# Altium PCB Therm_Expand_PCB.PcbDoc
Units mil, origin at the board's own origin, x right, y up, seen from the top; angles counter-clockwise.
Board outline 2695 x 1977.5 mil, 2 copper layers (Top Layer, Bottom Layer); 36 components, 65 nets, 204 pads, 124 vias.
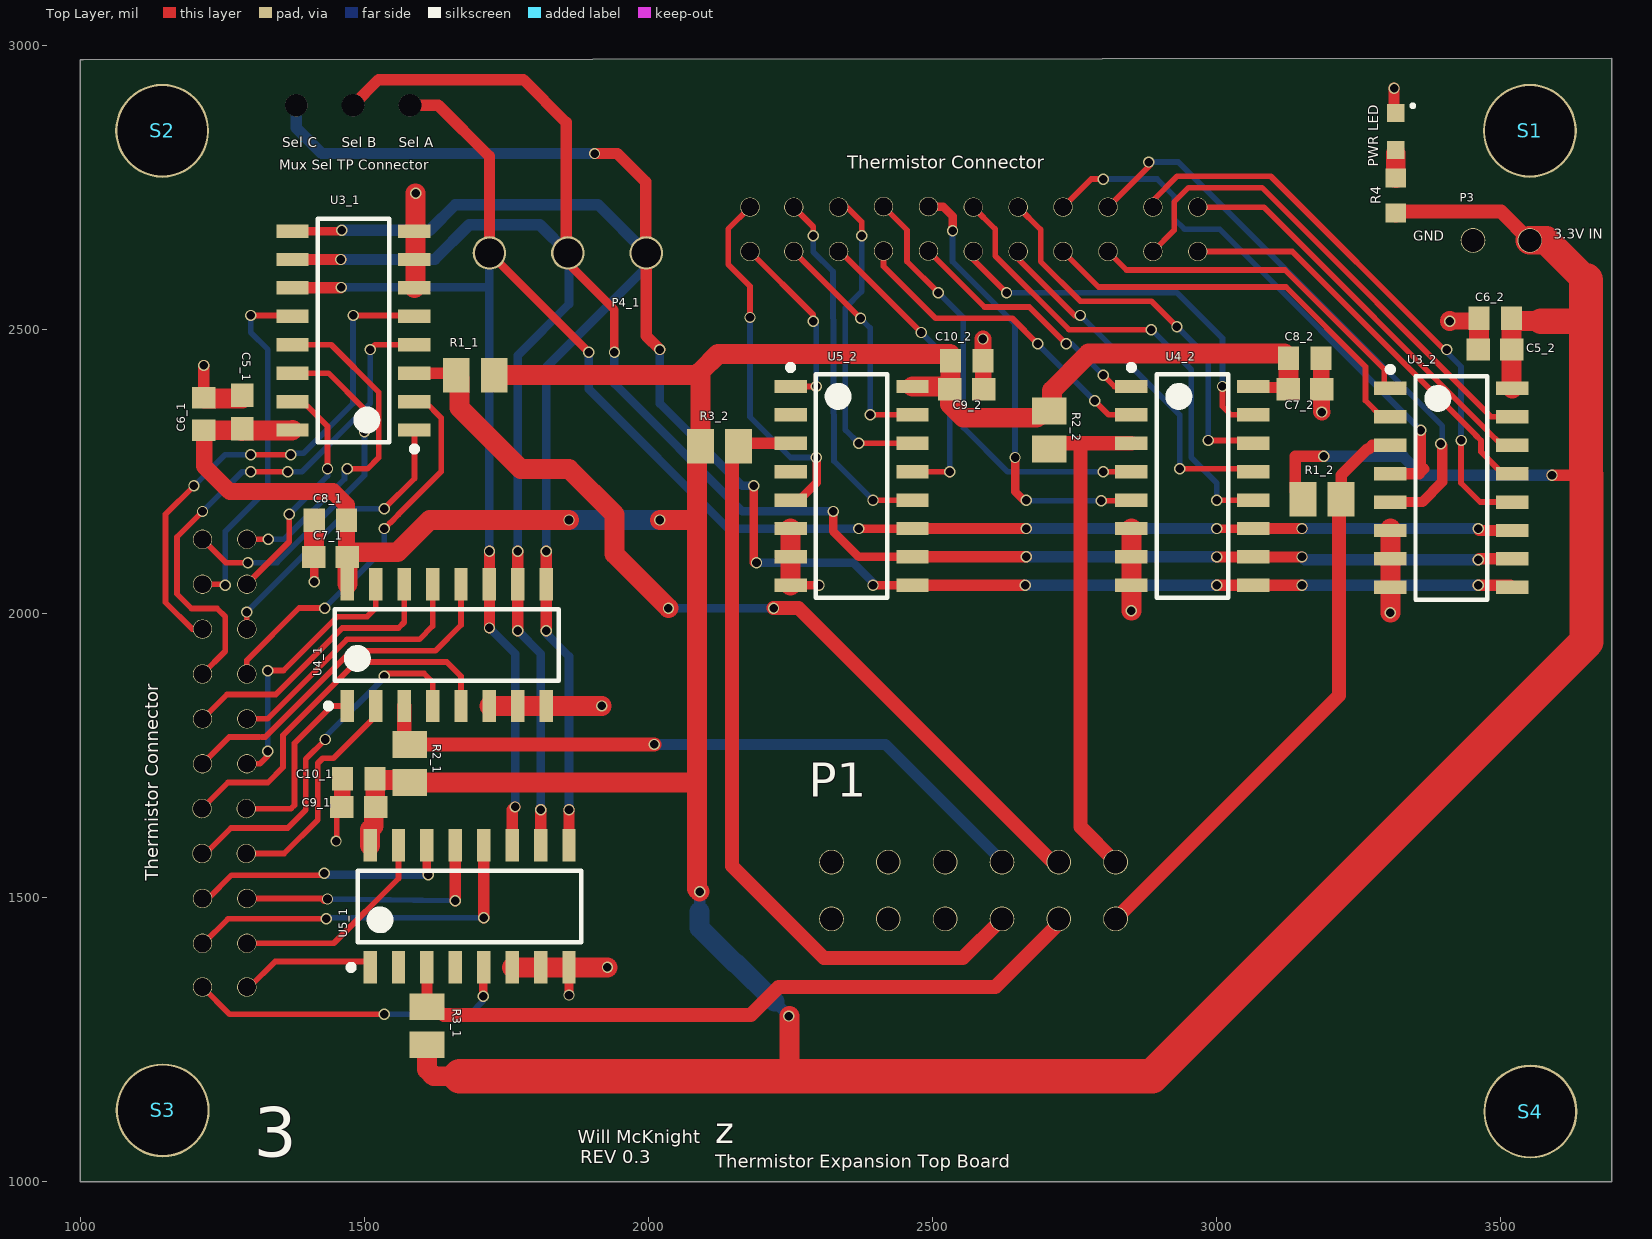
[diagram p0: Top Layer view]
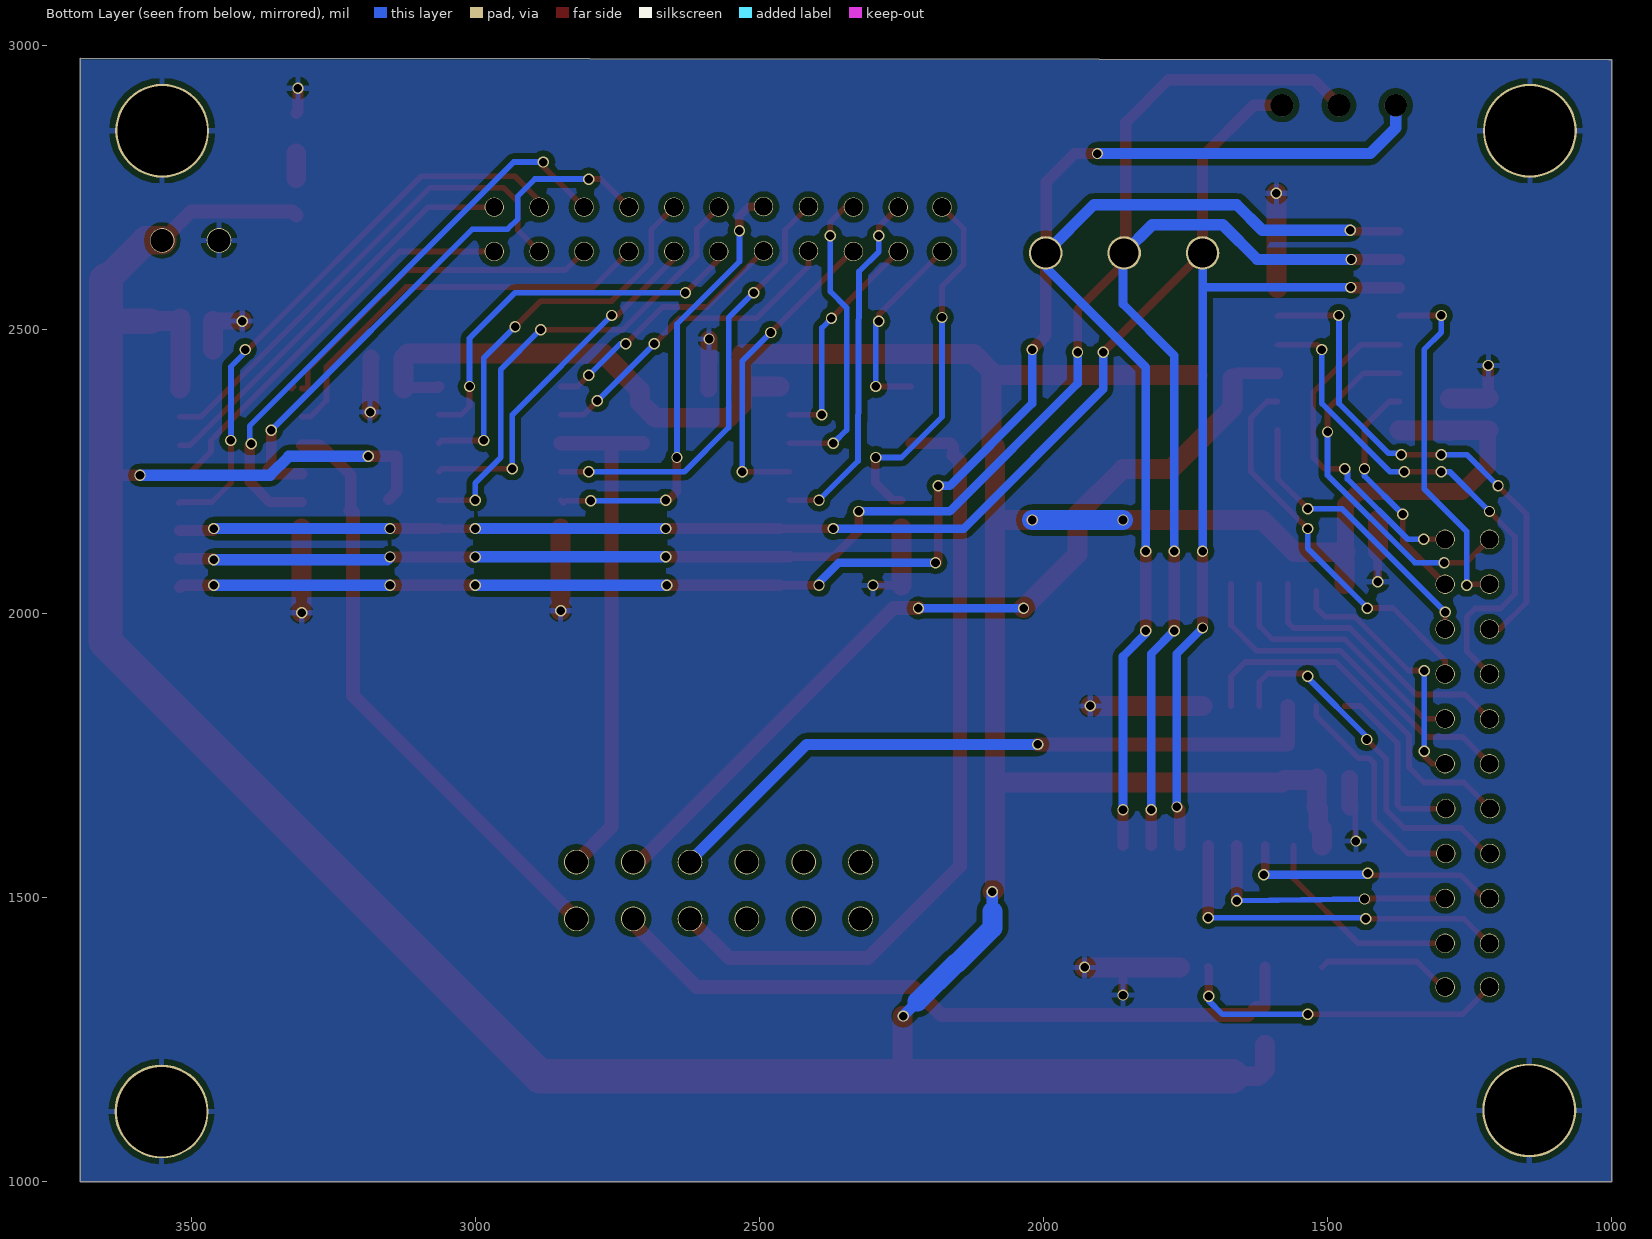
[diagram p1: Bottom Layer view, seen from below]

## Layer stack, top to bottom
Top Solder: solder mask 0.4, Solder Resist, Dk 3.5
Top Layer: signal copper 1.4
Dielectric 1: dielectric 12.6, FR-4, Dk 4.8
Bottom Layer: signal copper 1.4
Bottom Solder: solder mask 0.4, Solder Resist, Dk 3.5

## Board outline
1005,2975 3695,2977.5 3695,1000 1000,1000 1000,2975 1005,2975 1000,2975
cut-out: 3695,2975

## Design rules (kind name [scope] priority, off if disabled: settings)
Clearance [All] p1: gap=10 ignorepadtopadclearanceinfootprint=FALSE except(0: Arc-Hole Track-Hole SMDPad-Hole THPad-Hole Via-Hole Fill-Hole Poly-Hole Region-Hole Text-Hole; 5: SMDPad-SMDPad)
PolygonConnect [All] p1: connectstyle=Relief reliefconductorwidth=10 reliefentries=4 polygonreliefangle="90 Angle" airgapwidth=10
RoutingVias [All] p1: holewidth=15 width=20 viastyle="Through Hole" minholewidth=12 minwidth=18 maxholewidth=28 maxwidth=32
ShortCircuit [All] p1: allowed=TRUE
SolderMaskExpansion [All] p1: expansion=4
Width [All] p1: maxlimit=100 minlimit=6 preferedwidth=15 minimp=50.000000 maximp=50.000000 favimp=50.000000
29 further rules are at their usual default settings.

## Classes and differential pairs
component class Data_TransferA_U_AHK50H-ND_THERM_CONNECTOR1: "Thermistor Connector"
component class Data_TransferB_U_AHK50H-ND_THERM_CONNECTOR2: "Thermistor Connector"
component class U_Data_Conversion: R4 "SPI Connector"
component class Data_TransferA_U_Single_Mux1: C5_1 C6_1 C7_1 C8_1 C9_1 C10_1 "Mux Sel TP Connector" P4_1 R1_1 R2_1 R3_1 U3_1 U4_1 U5_1
component class Data_TransferB_U_Single_Mux2: C5_2 C6_2 C7_2 C8_2 C9_2 C10_2 R1_2 R2_2 R3_2 TP11 U3_2 U4_2 U5_2
net class ADC_OUTA[1..2]: ADC_OUTA1 ADC_OUTA2
channel class 50Pin_Connector: Data_TransferA_U_AHK50H-ND_THERM_CONNECTOR1 Data_TransferB_U_AHK50H-ND_THERM_CONNECTOR2
channel class MID: Data_Transfer1 Data_Transfer2
channel class Multiplexers: Data_TransferA_U_Single_Mux1 Data_TransferB_U_Single_Mux2
net class ADC_OUTB[1..2]: ADC_OUTB1 ADC_OUTB2
net class ADC_OUTC[1..2]: ADC_OUTC1 ADC_OUTC2

## Components (designator, comment, footprint, x,y, rotation, side; value= is the part's Value field where it differs from the comment)
C5_1 "0.1uF" "0.1UF BYPASS CAPACITOR" 1285,2355 r270 top
C5_2 "0.1uF" "0.1UF BYPASS CAPACITOR" 3490,2465 r0 top
C6_1 "1uF" 1UF_SAMSUNG 1217,2351.54 r270 top
C6_2 "1uF" 1UF_SAMSUNG 3490,2520 r0 top
C7_1 "0.1uF" "0.1UF BYPASS CAPACITOR" 1440,2100 r0 top
C7_2 "0.1uF" "0.1UF BYPASS CAPACITOR" 3155,2395 r180 top
C8_1 "1uF" 1UF_SAMSUNG 1440,2165 r0 top
C8_2 "1uF" 1UF_SAMSUNG 3155,2450 r180 top
C9_1 "0.1uF" "0.1UF BYPASS CAPACITOR" 1490,1660 r0 top
C9_2 "0.1uF" "0.1UF BYPASS CAPACITOR" 2560,2395 r180 top
C10_1 "1uF" 1UF_SAMSUNG 1490,1710 r0 top
C10_2 "1uF" 1UF_SAMSUNG 2560,2445 r180 top
"Mux Sel TP Connector" "3 POS Mux Select Header" "Mux Select 3 Pos Header Pin" 1580,2895 r180 top
P1 "12 POS ADC Header" "12 POS Dual Header" 2321.98,1463.01 r0 top
P3 "2 Pos Power Header without 3D body" "2 Pos Power Header - duplicate" 3551,2657 r180 top
P4_1 "Mux_Sel" 3-SCREW-TERMINAL-MUX-SELECT 2030,2614 r180 top
R1_1 "6.49kOhm SMD Resistor" RESC2012X06N 1695,2420 r0 top
R1_2 "6.49kOhm SMD Resistor" RESC2012X06N 3185.46,2201.54 r180 top
R2_1 "6.49kOhm SMD Resistor" RESC2012X06N 1580,1736.54 r270 top
R2_2 "6.49kOhm SMD Resistor" RESC2012X06N 2705,2323.46 r90 top
R3_1 "6.49kOhm SMD Resistor" RESC2012X06N 1610,1275 r270 top
R3_2 "6.49kOhm SMD Resistor" RESC2012X06N 2125,2295 r180 top
R4 "Green" Green_LED_Resistor_90.9 3315,2736 r270 top
S1 "#6-32 Standoff" "#6-32 Stand Off"#1 3955,4057 r0 top
S2 "#6-32 Standoff" "#6-32 Stand Off"#2 1548,4057 r0 top
S3 "#6-32 Standoff" "#6-32 Stand Off"#3 1549,2333 r0 top
S4 "#6-32 Standoff" "#6-32 Stand Off"#4 3956,2331 r0 top
"Thermistor Connector" "22-Pin-Connector" "22-PIN CONENCTOR" 14777,15148 r90 top
"Thermistor Connector" "22-Pin-Connector" "22-PIN CONENCTOR" 15983.54,-10846.43 r0 top
U3_1 "8:1 - MUX" SOP127P600X175 1480.72,2498.46 r180 top
U3_2 "8:1 - MUX" SOP127P600X175 3412.74,2221.54 r0 top
U4_1 "8:1 - MUX" SOP127P600X175 1645,1945 r90 top
U4_2 "8:1 - MUX" SOP127P600X175 2957,2225 r0 top
U5_1 "8:1 - MUX" SOP127P600X175 1685,1485 r90 top
U5_2 "8:1 - MUX" SOP127P600X175 2357.28,2225 r0 top
? "LED" GREEN_SMD_LED 3379,3227 r270 top

## Footprints (in the part's own frame and the unit in brackets; to place one, negate y for a bottom-side part, rotate by r counter-clockwise, add the part's x,y. Pads: shape width x height; smd on the part's side, far side on the other; paste and mask are expansions set on the pad)
"0.1UF BYPASS CAPACITOR" [mm] "Chip Capacitor, 2-Leads, Body 1.60x0.80mm, IPC Medium Density"
  rect 1.05x1 smd: 1(-0.75,0) 2(0.75,0)
  body extent -0.87,-0.48 0.87,0.48, height 0.9
1UF_SAMSUNG [mm]
  rect 0.95x1.05 smd: 1(-0.725,0) 2(0.725,0)
  body extent -0.85,-0.45 0.85,0.45, height 0.9
"2 Pos Power Header - duplicate" [mm] "Without 3D body,"
  round 1.1 hole 1.02: 1(0,0) 2(2.54,0)
3-SCREW-TERMINAL-MUX-SELECT [mm]
  round 1.5 hole 1.3: 1(0.864,-0.533) 2(4.369,-0.533) 3(7.874,-0.533)
  body extent -1.43,-4.08 10.07,2.92, height 8.5
"12 POS Dual Header" [mm] "Board to Board ADC Channel Header"
  round 1.1 hole 1.02: 1(0,0) 2(0,2.54) 3(2.54,2.54) 4(2.54,0) 5(5.08,0) 6(5.08,2.54) 7(7.62,2.54) 8(7.62,0) 9(10.16,0) 10(10.16,2.54) 11(12.7,2.54) 12(12.7,0)
  body extent -1.27,-3.18 13.97,4.7, height 20.46
"22-PIN CONENCTOR" [mil]
  round 34 hole 31.5: 1(-13017,13484) 2(-13017,13562) 3(-13096,13484) 4(-13096,13562) 5(-13175,13484) 6(-13175,13562) 7(-13254,13484) 8(-13254,13562) 9(-13333,13484) 10(-13333,13562) 11(-13412,13484) 12(-13412,13562) 13(-13491,13485) 14(-13491,13563) 15(-13570,13485) 16(-13570,13563) 17(-13649,13484) 18(-13649,13562) 19(-13728,13484) 20(-13728,13562) 22(-13805,13562) 51(-13805,13484)
  body extent -13883,13472 -12939,13866, height 199
"#6-32 Stand Off"#1 [mm]
  round 4.2 hole 4: S1(-10.262,-30.658)
  body extent -13.92,-33.83 -6.6,-27.48, height 10.32
"#6-32 Stand Off"#2 [mm]
  round 4.2 hole 4: S2(-10.262,-30.658)
  body extent -13.92,-33.83 -6.6,-27.48, height 10.32
"#6-32 Stand Off"#3 [mm]
  round 4.2 hole 4: S3(-10.262,-30.658)
  body extent -13.92,-33.83 -6.6,-27.48, height 10.32
"#6-32 Stand Off"#4 [mm]
  round 4.2 hole 4: S4(-10.262,-30.658)
  body extent -13.92,-33.83 -6.6,-27.48, height 10.32
Green_LED_Resistor_90.9 [mm]
  rect 0.85x0.9 smd: 1(-0.775,0) 2(0.775,0)
  body extent -0.85,-0.45 0.85,0.45, height 0.55
GREEN_SMD_LED [mil]
  rect 31.5x31.5 smd: 1(346,-64) 2(411,-64)
  silkscreen extent 332,-35 334,-33, body extent 346,-79 410,-48, height 28
"Mux Select 3 Pos Header Pin" [mm]
  round 1 hole 1.02: 1(0,0) 2(2.54,0) 3(5.08,0)
  body extent -1.19,-7.26 6.43,1.24, height 5.77
RESC2012X06N [mm] "Chip Resistor, 2-Leads, Body 2.00x1.25mm, IPC Medium Density"
  rect 1.2x1.55 smd: 1(-0.85,0) 2(0.85,0)
  body extent -1.1,-0.58 1.1,0.58, height 0.6
SOP127P600X175 [mm] "SOP, 16-Leads, Body 9.90x3.90mm, Pitch 1.27mm, IPC Medium Density"
  rect 1.45x0.6 smd: 1(-2.725,4.445) 2(-2.725,3.175) 3(-2.725,1.905) 4(-2.725,0.635) 5(-2.725,-0.635) 6(-2.725,-1.905) 7(-2.725,-3.175) 8(-2.725,-4.445) 9(2.725,-4.445) 10(2.725,-3.175) 11(2.725,-1.905) 12(2.725,-0.635) 13(2.725,0.635) 14(2.725,1.905) 15(2.725,3.175) 16(2.725,4.445)
  silkscreen extent -2.85,-5 1.6,5.42, body extent -3,-5 3,5, height 1.75

## Part data
C5_1 C5_2 C7_1 C7_2 C9_1 C9_2: library part "0.1uF Cap", "0.1uF Bypass Cap", Case/Package=0603, Case Code (Metric)=1608, Dielectric=X7R, Dielectric Material=Ceramic, Manufacturer=KEMET, Manufacturer Part Number=C0603C104K9RACTU, Max Operating Temperature=125°C, Min Operating Temperature=-55°C, Package Quantity=4000, Supplier Part Number 1=399-15351-1-ND, Tolerance=10%, Voltage Rating=6.3V, Case Code (Imperial)=0603, ComponentLink1Description=https://datasheet.ciiva.com/13371/kem-c1002-x7r-smd-357932-13371879.pdf?src-supplier=Mouser, ComponentLink1URL=https://datasheet.ciiva.com/13371/kem-c1002-x7r-smd-357932-13371879.pdf?src-supplier=Mouser, Dissipation Factor=5%, Height=0.8mm, Length=1.6mm, Mount="Surface Mount", Packaging="Tape and Reel", Pricing 1="1=0.19000, 10=0.13800, 100=0.06480, 500=0.04546, 1000=0.03763 (USD)", RoHS=Yes, Stock 1=758, Supplier 1=Digi-Key, Termination=SMD/SMT, Thickness=0.034inch, Voltage Rating (DC)=6.3V, Width=0.8mm
C6_1 C6_2 C10_1 C10_2: library part "1uF Samsung Cap", "1uF Samsung Cap", Case/Package=0603, Case Code (Metric)=1608, Dielectric=X7R, Manufacturer=Samsung, Manufacturer Part Number=CL10B105KP8NNNC, Max Operating Temperature=125°C, Min Operating Temperature=-55°C, Package Quantity=1, Supplier Part Number 1=1276-1946-1-ND, Tolerance=10%, Voltage Rating=10V, Capacitance=1uF, Case Code (Imperial)=0603, ComponentLink1Description=https://media.digikey.com/pdf/Data%20Sheets/Samsung%20PDFs/CL_Series_MLCC_ds.pdf?src-supplier=Digi-Key, ComponentLink1URL=https://media.digikey.com/pdf/Data%20Sheets/Samsung%20PDFs/CL_Series_MLCC_ds.pdf?src-supplier=Digi-Key, ComponentLink2Description=http://www1.futureelectronics.com/doc/SAMSUNG/CL10B105KP8NNNC.pdf?src-supplier=Future+Electronics, ComponentLink2URL=http://www1.futureelectronics.com/doc/SAMSUNG/CL10B105KP8NNNC.pdf?src-supplier=Future+Electronics, ComponentLink3Description=https://www.verical.com/server-webapp/html/getDatasheet?partID=358410&src-supplier=Verical, ComponentLink3URL=https://www.verical.com/server-webapp/html/getDatasheet?partID=358410&src-supplier=Verical, Contact Plating=Tin, Depth=0.8mm, Height=0.8mm, Lead Free="Lead Free", Length=1.6mm, Mount="Surface Mount", Packaging="Tape and Reel", Pricing 1="1=0.1, 10=0.052, 100=0.0233, 500=0.0166, 1000=0.0131 (USD)", Radiation Hardening=No, Stock 1=10781730, Supplier 1=Digi-Key, Thickness=0.035inch, Voltage Rating (DC)=10V, Width=0.031inch
C8_1 C8_2: library part "1uF Samsung Cap", "1uF Samsung Cap", Case/Package=0603, Case Code (Metric)=1608, Dielectric=X7R, Manufacturer=Samsung, Manufacturer Part Number=CL10B105KP8NNNC, Max Operating Temperature=125°C, Min Operating Temperature=-55°C, Package Quantity=1, Supplier Part Number 1=1276-1946-1-ND, Tolerance=10%, Voltage Rating (DC)=10V, Capacitance=1uF, Case Code (Imperial)=0603, ComponentLink1Description=https://media.digikey.com/pdf/Data%20Sheets/Samsung%20PDFs/CL_Series_MLCC_ds.pdf?src-supplier=Digi-Key, ComponentLink1URL=https://media.digikey.com/pdf/Data%20Sheets/Samsung%20PDFs/CL_Series_MLCC_ds.pdf?src-supplier=Digi-Key, ComponentLink2Description=http://www1.futureelectronics.com/doc/SAMSUNG/CL10B105KP8NNNC.pdf?src-supplier=Future+Electronics, ComponentLink2URL=http://www1.futureelectronics.com/doc/SAMSUNG/CL10B105KP8NNNC.pdf?src-supplier=Future+Electronics, ComponentLink3Description=https://www.verical.com/server-webapp/html/getDatasheet?partID=358410&src-supplier=Verical, ComponentLink3URL=https://www.verical.com/server-webapp/html/getDatasheet?partID=358410&src-supplier=Verical, Contact Plating=Tin, Depth=0.8mm, Height=0.8mm, Lead Free="Lead Free", Length=1.6mm, Mount="Surface Mount", Packaging="Tape and Reel", Pricing 1="1=0.1, 10=0.052, 100=0.0233, 500=0.0166, 1000=0.0131 (USD)", Radiation Hardening=No, Stock 1=10781730, Supplier 1=Digi-Key, Thickness=0.035inch, Width=0.031inch
"Mux Sel TP Connector": Supplier Part Number 1=2057-PH1RA-03-UA-ND, Supplier 1=Digi-Key
P1: "Interboard connector for thermistors connecting to ADC", Color=Black, Manufacturer=3M, Manufacturer Part Number=929715-06-06-EU, Package Quantity=500, Supplier Part Number 1=3M156375-12-ND, ComponentLink1Description=http://www.mouser.com/ds/2/1/ts0769-35914.pdf?src-supplier=Mouser, ComponentLink1URL=http://www.mouser.com/ds/2/1/ts0769-35914.pdf?src-supplier=Mouser, ComponentLink2Description=http://components.arrow.com/part/dataview/42715320S8912076N3321?src-supplier=Arrow, ComponentLink2URL=http://components.arrow.com/part/dataview/42715320S8912076N3321?src-supplier=Arrow, ComponentLink3Description=http://multimedia.3m.com/mws/mediawebserver?66666UuZjcFSLXTtmXME5x46EVuQEcuZgVs6EVs6E666666--?src-supplier=Digi-Key, ComponentLink3URL=http://multimedia.3m.com/mws/mediawebserver?66666UuZjcFSLXTtmXME5x46EVuQEcuZgVs6EVs6E666666--?src-supplier=Digi-Key, Connector Type="Male Pin", Contact Mating Length=0.318inch, Contact Plating=Gold, Gender=Male, Mount="Through Hole", Number of Positions=12, Number of Rows=2, Packaging=Bulk, Pitch=0.1inch, Pricing 1="1=1.86000, 10=1.69000, 25=1.58600, 50=1.51720, 100=1.44820, 250=1.31024, 500=1.20680 (USD)", RoHS=Yes, Row Spacing=0.1inch, Stock 1=0, Supplier 1=Digi-Key, Termination=Solder
P3: "No supplier part for this schematic symbol, only here to create board to board holes for the power header"
P4_1: library part 3-Screw-Terminal-Mux-Select, "Mux Select", Color=Blue, Current Rating=10A, Manufacturer="Wurth Electronics", Manufacturer Part Number=691103110003, Supplier Part Number 1=732-2746-ND, Voltage Rating=125V, ComponentLink1Description=http://www.farnell.com/datasheets/1442217.pdf?src-supplier=Element14, ComponentLink1URL=http://www.farnell.com/datasheets/1442217.pdf?src-supplier=Element14, Contact Material=Brass, Height=12.2mm, Housing Material=Nylon, Length=7mm, Number of Contacts=3, Number of Levels=1, Number of Positions Per Level=3, Pitch=0.138inch, Pricing 1="1=1.1, 10=0.986, 50=0.851, 100=0.762, 500=0.717, 980=0.672 (USD)", REACH SVHC=Unknown, Stock 1=617, Stripping Length=-6mm, Supplier 1=Digi-Key, Termination=Screw, Width=11.5mm, Wire/Cable Gauge=26AWG
R1_1 R1_2 R2_1 R2_2 R3_1 R3_2: Case/Package=0805, Case Code (Metric)=2012, Manufacturer=Panasonic, Manufacturer Part Number=ERA6AEB6491V, Max Operating Temperature=155°C, Max Power Dissipation=125mW, Min Operating Temperature=-55°C, Package Quantity=1, Resistance=6.49K, Supplier Part Number 1=P6.49KDACT-ND, Temperature Coefficient=25ppm/°C, Tolerance=0.1%, Voltage Rating=100V, Case Code (Imperial)=0805, ComponentLink1Description=http://www.farnell.com/datasheets/485442.pdf?src-supplier=Farnell, ComponentLink1URL=http://www.farnell.com/datasheets/485442.pdf?src-supplier=Farnell, ComponentLink2Description=http://www.mouser.com/ds/2/315/AOA0000CE26-32660.pdf?src-supplier=Mouser, ComponentLink2URL=http://www.mouser.com/ds/2/315/AOA0000CE26-32660.pdf?src-supplier=Mouser, ComponentLink3Description=http://www.farnell.com/datasheets/2059650.pdf?src-supplier=Farnell, ComponentLink3URL=http://www.farnell.com/datasheets/2059650.pdf?src-supplier=Farnell, ComponentLink4Description=http://uk.rs-online.com/webdocs/0eb1/0900766b80eb1d8c.pdf?src-supplier=RSComponents, ComponentLink4URL=http://uk.rs-online.com/webdocs/0eb1/0900766b80eb1d8c.pdf?src-supplier=RSComponents, ComponentLink5Description=http://www.farnell.com/datasheets/485442.pdf?src-supplier=Element14, ComponentLink5URL=http://www.farnell.com/datasheets/485442.pdf?src-supplier=Element14, ComponentLink6Description=http://www.produktinfo.conrad.com/datenblaetter/1100000-1199999/001181295-da-01-en-WIDERSTAND_ERA_0805_6K49_0_1__5000ST.pdf?src-supplier=Conrad, ComponentLink6URL=http://www.produktinfo.conrad.com/datenblaetter/1100000-1199999/001181295-da-01-en-WIDERSTAND_ERA_0805_6K49_0_1__5000ST.pdf?src-supplier=Conrad, Composition="Thin Film,Metal Film", Contact Plating=Tin, Depth=1.25mm, Features="Automotive AEC-Q200", Height=0.5mm, Lead Free="Lead Free", Length=2mm, Military Standard=Not, Mount="Surface Mount", Number of Pins=2, Number of Terminations=2, Packaging="Tape and Reel", Power Rating=125mW, Pricing 1="1=0.36, 10=0.302, 100=0.1182, 1000=0.0495, 2500=0.0454 (USD)", Radiation Hardening=No, REACH SVHC="No SVHC", Stock 1=15147, Supplier 1=Digi-Key, Termination=SMD/SMT, Voltage Rating (DC)=100V, Width=1.25mm
R4: library part Green_LED_Res, Case/Package=0201, Case Code (Metric)=0603, Manufacturer=Panasonic, Manufacturer Part Number=ERJ-1GNF90R9C, Max Operating Temperature=125°C, Max Power Dissipation=50mW, Min Operating Temperature=-55°C, Package Quantity=15000, Resistance=90.9R, Supplier Part Number 1=311-90.9HRCT-ND, Temperature Coefficient=200ppm/°C, Tolerance=1%, Voltage Rating=25V, Voltage Rating (DC)=50V, Case Code (Imperial)=0201, ComponentLink1Description=https://datasheet.ciiva.com/15189/getdatasheetpartid-326528-15189836.pdf?src-supplier=Verical, ComponentLink1URL=https://datasheet.ciiva.com/15189/getdatasheetpartid-326528-15189836.pdf?src-supplier=Verical, ComponentLink2Description=https://datasheet.ciiva.com/12558/rc0603-272842-12558285.pdf?src-supplier=Mouser, ComponentLink2URL=https://datasheet.ciiva.com/12558/rc0603-272842-12558285.pdf?src-supplier=Mouser, Composition="Thick Film", Contact Plating=Tin,Matte, Depth=0.8mm, Height=0.01inch, Lead Free="Lead Free", Length=0.024inch, Military Standard=Not, Mount="Surface Mount", Number of Terminations=2, Packaging="Tape and Reel", Power Rating=50mW, Pricing 1="1=0.10000, 10=0.02400, 100=0.00970, 1000=0.00437, 2500=0.00379 (USD)", Radiation Hardening=No, RoHS=Yes, Stock 1=401780, Supplier 1=Digi-Key, Termination=SMD/SMT, Width=0.3mm
S1 S2 S3 S4: "Hex Standoff for Thermistor Boards", Manufacturer=RAF, Manufacturer Part Number=2102T-632-AL-7, Package Quantity=100, Supplier Part Number 1=1772-1144-ND, Pricing 1="1=0.5, 25=0.3328, 100=0.2834, 250=0.2692, 500=0.2551, 1000=0.2409 (USD)", Stock 1=1687, Supplier 1=Digi-Key
"Thermistor Connector" "Thermistor Connector": Color=Black, Contact Resistance=30mR, Current Rating=2A, Manufacturer=Hirose, Manufacturer Part Number=DF11-22DP-2DS(24), Max Operating Temperature=85°C, Min Operating Temperature=-30°C, Package Quantity=20, Supplier Part Number 1=H10253-ND, Voltage Rating=250V, ComponentLink1Description=http://docs-usa.electrocomponents.com/techlib:/itc_doclist_US.htm?stockno=6888963&src-supplier=Allied+Electronics, ComponentLink1URL=http://docs-usa.electrocomponents.com/techlib:/itc_doclist_US.htm?stockno=6888963&src-supplier=Allied+Electronics, ComponentLink2Description=https://www.verical.com/server-webapp/html/getDatasheet?partID=456315&src-supplier=Verical, ComponentLink2URL=https://www.verical.com/server-webapp/html/getDatasheet?partID=456315&src-supplier=Verical, ComponentLink3Description=http://www.hirose.co.jp/cataloge_hp/en_DF11_20130411.pdf?src-supplier=Future+Electronics, ComponentLink3URL=http://www.hirose.co.jp/cataloge_hp/en_DF11_20130411.pdf?src-supplier=Future+Electronics, ComponentLink4Description=http://www.farnell.com/datasheets/91550.pdf?src-supplier=Element14, ComponentLink4URL=http://www.farnell.com/datasheets/91550.pdf?src-supplier=Element14, ComponentLink5Description=http://www.mouser.com/ds/2/185/DF11_catalog-1064296.pdf?src-supplier=Mouser, ComponentLink5URL=http://www.mouser.com/ds/2/185/DF11_catalog-1064296.pdf?src-supplier=Mouser, ComponentLink6Description=http://documents.rs-components.com/techlib://itc_doclist_GB.htm?stockno=6056598&src-supplier=RSComponents, ComponentLink6URL=http://documents.rs-components.com/techlib://itc_doclist_GB.htm?stockno=6056598&src-supplier=RSComponents, Connector Type="Male Pin", Contact Material="Brass,Copper Alloy,Tin", Contact Mating Length=0.118inch, Contact Plating=Tin, Depth=10mm, Fastening Type=Detent, Gender=Male, Height=5mm, Housing Color=Black, Housing Material=Polyamide, Lead Free="Lead Free", Length=24mm, Max Current Rating=2A, Mount="Through Hole", Number of Contacts=22, Number of Positions=22, Number of Rows=2, Orientation="Right Angle", Packaging=Rail/Tube, Pitch=2mm, Pricing 1="1=1.19, 20=1.0455, 100=0.902, 500=0.738, 1000=0.656 (USD)", Radiation Hardening=No, Row Spacing=0.079inch, Stock 1=536, Supplier 1=Digi-Key, System=Connector, Termination=Solder
U3_1 U3_2 U4_1 U4_2 U5_1 U5_2: Case/Package=TSSOP, High Level Output Current=25mA, Manufacturer="Texas Instruments", Manufacturer Part Number=SN74LV4051ATPWRQ1, Max Operating Temperature=105°C, Max Supply Voltage=5.5V, Min Operating Temperature=-40°C, Min Supply Voltage=2V, On-State Resistance=75R, Operating Supply Current=20uA, Package Quantity=1, Supplier Part Number 1=296-19260-1-ND, Bandwidth=35MHz, ComponentLink1Description=http://www.ti.com/lit/ds/symlink/sn74lv4051a-q1.pdf?src-supplier=Digi-Key, ComponentLink1URL=http://www.ti.com/lit/ds/symlink/sn74lv4051a-q1.pdf?src-supplier=Digi-Key, ComponentLink2Description=http://www.ti.com/lit/gpn/sn74lv4051a-q1?src-supplier=Mouser, ComponentLink2URL=http://www.ti.com/lit/gpn/sn74lv4051a-q1?src-supplier=Mouser, ComponentLink3Description=https://www.verical.com/server-webapp/html/getDatasheet?partID=137249&src-supplier=Verical, ComponentLink3URL=https://www.verical.com/server-webapp/html/getDatasheet?partID=137249&src-supplier=Verical, ComponentLink4Description=http://focus.ti.com/lit/ds/symlink/sn74lv4051a-q1.pdf?src-supplier=Avnet, ComponentLink4URL=http://focus.ti.com/lit/ds/symlink/sn74lv4051a-q1.pdf?src-supplier=Avnet, ComponentLink5Description=http://www.produktinfo.conrad.com/datenblaetter/1100000-1199999/001187277-da-01-en-IC_MUX_DE_SN74LV4051ATPWRQ1_TSSOP_16_TID.pdf?src-supplier=Conrad, ComponentLink5URL=http://www.produktinfo.conrad.com/datenblaetter/1100000-1199999/001187277-da-01-en-IC_MUX_DE_SN74LV4051ATPWRQ1_TSSOP_16_TID.pdf?src-supplier=Conrad, Contact Plating=Gold, Lead Free="Lead Free", Logic Function=Multiplexer,Demultiplexer, Low Level Output Current=25mA, Mount="Surface Mount", Number of Bits=8, Number of Channels=1, Number of Circuits=1, Number of Inputs=8, Number of Outputs=1, Number of Pins=16, Packaging="Tape and Reel", Pricing 1="1=0.73, 10=0.646, 100=0.4951, 500=0.3914, 1000=0.3131 (USD)", Propagation Delay=7ns, Radiation Hardening=No, REACH SVHC="No SVHC", Stock 1=41099, Supplier 1=Digi-Key, Supply Type=Single, Turn-Off Delay Time=20ns, Turn-On Delay Time=20ns, Weight=0.002169oz
?: library part GREEN_LED, Case/Package=0603, Case Code (Metric)=1608, Color=Green, Forward Current=20mA, Forward Voltage=2V, Lens Color=Colorless,Clear, Manufacturer=Dialight, Manufacturer Part Number=5988070107F, Max Operating Temperature=100°C, Min Operating Temperature=-30°C, Package Quantity=4000, Power Dissipation=60mW, Reverse Voltage=5V, Supplier Part Number 1=350-2035-1-ND, Case Code (Imperial)=0603, ComponentLink1Description=http://www.mouser.com/ds/2/109/SMT_selector_guide-267443.pdf?src-supplier=Mouser, ComponentLink1URL=http://www.mouser.com/ds/2/109/SMT_selector_guide-267443.pdf?src-supplier=Mouser, ComponentLink2Description=http://uk.rs-online.com/webdocs/0ae2/0900766b80ae2975.pdf?src-supplier=RSComponents, ComponentLink2URL=http://uk.rs-online.com/webdocs/0ae2/0900766b80ae2975.pdf?src-supplier=RSComponents, ComponentLink3Description=http://www.farnell.com/datasheets/1720200.pdf?src-supplier=Element14, ComponentLink3URL=http://www.farnell.com/datasheets/1720200.pdf?src-supplier=Element14, ComponentLink4Description=https://media.digikey.com/pdf/Data%20Sheets/Dialight%20PDFs/598_Series_0603_Pkg.pdf?src-supplier=Digi-Key, ComponentLink4URL=https://media.digikey.com/pdf/Data%20Sheets/Dialight%20PDFs/598_Series_0603_Pkg.pdf?src-supplier=Digi-Key, ComponentLink5Description=http://www.farnell.com/datasheets/1484480.pdf?src-supplier=Element14, ComponentLink5URL=http://www.farnell.com/datasheets/1484480.pdf?src-supplier=Element14, ComponentLink6Description=https://www.alliedelec.com/m/d/745256ca487aea7b70ea31e2d673d5bb.pdf?src-supplier=Allied+Electronics, ComponentLink6URL=https://www.alliedelec.com/m/d/745256ca487aea7b70ea31e2d673d5bb.pdf?src-supplier=Allied+Electronics, ComponentLink7Description=http://www.onlinecomponents.com/productFiles/mf-DIA/mdei5980603.pdf?src-supplier=Onlinecomponents.com, ComponentLink7URL=http://www.onlinecomponents.com/productFiles/mf-DIA/mdei5980603.pdf?src-supplier=Onlinecomponents.com, ComponentLink8Description=https://www.verical.com/server-webapp/html/getDatasheet?partID=146438&src-supplier=Verical, ComponentLink8URL=https://www.verical.com/server-webapp/html/getDatasheet?partID=146438&src-supplier=Verical, ComponentLink9Description=http://www.dialight.com/Assets/Brochures_And_Catalogs/Indication/SMT_selector_guide.pdf?src-supplier=Future+Electronics, ComponentLink9URL=http://www.dialight.com/Assets/Brochures_And_Catalogs/Indication/SMT_selector_guide.pdf?src-supplier=Future+Electronics, Depth=0.8mm, Dominant Wavelength=568nm, Height=0.7mm, Illumination Color=Green, Lead Free="Lead Free", Length=1.6mm, Lens Size=0.8mm, Lens Style=Flat,Rectangular,Diffused,Colorless,Clear, Lens Transparency=Clear, Luminous Intensity=20mcd, Mount="Surface Mount", Number of Elements=1, Number of LEDs=1, Number of Pins=2, Packaging="Tape and Reel", Pricing 1="1=0.46, 10=0.33, 25=0.2528, 100=0.1648, 250=0.1209, 500=0.1026, 1000=0.0843 (USD)", Radiation Hardening=No, REACH SVHC="No SVHC", Stock 1=228546, Supplier 1=Digi-Key, Test Current=20mA, Viewing Angle=140°, Wavelength=570nm, Width=0.8mm

## Via types
v1: diameter 20, hole 15, Top Layer to Bottom Layer, 116 vias
v2: diameter 20, hole 15, Top Layer to Bottom Layer, tented top, 8 vias

## Nets (pads, with @x,y where several pads share a name; then routed paths per layer and width w, separated by ;. In a path a pad name is that pad's centre, name@x,y a point inside that pad or via, vN(x,y) a via of type N, cw(c..) or ccw(c..) an arc to the next point about the centre after c; other vN are vias at no path point)
+3.3V_AN: C5_1.2 C5_2.2 C6_1.2 C6_2.2 C7_1.2 C7_2.2 C8_1.2 C8_2.2 C9_1.2 C9_2.2 C10_1.2 C10_2.2 P3.1 R1_1.2 R1_2.2 R2_1.2 R2_2.2 R3_1.2 R3_2.2 R4.2 U3_1.16 U3_2.16 U4_1.16 U4_2.16 U5_1.16 U5_2.16 | length 9283.6
  Top Layer w19.68: U4_2.16 3066.25,2398.03 3122.44,2398.03 C7_2.2
  Top Layer w20: v2(2247,1292) v2@2248,1292 ; 2248,1183 2248,1186 ; C7_2.2 C7_2.2@3126.46,2395.99 ; R1_2.2 3138,2215.54 3138,2277 v2(3188,2277) ; v2(3590,2244) 3638,2244 3651,2244
  Top Layer w25: R4.2@3315,2701.49 3321.51,2708 3500,2708 P3.1
  Top Layer w29.53: C6_1.2 1218.03,2321.97 1218.03,2260.01 1262.8,2215.24 1314.4,2215.24 1444.76,2215.24 1468.54,2191.46 C8_1.2 C7_1.2@1468.54,2110
  Top Layer w35: C6_1.2 1283.46,2323 1285,2321.46 1286.04,2322.5 1372.48,2322.5 U3_1.16 ; C7_1.2@1468.54,2110 1470,2108.54 C7_1.2@1470,2108.33 ; U4_1.16 C7_1.2@1470,2108.33 ; U5_1.16 1510,1620 1516.36,1626.36 1516.36,1657.81 1518.54,1660 C9_1.2 1519.04,1660.49 C10_1.2@1519.04,1707.89 ; C10_1.2 1518.54,1708.39 C10_1.2@1519.04,1707.89 ; R3_1.2 1610,1198 1622,1186 1668,1186 ; R1_1.2 2091.54,2420 ; v1(1860,2165) 1615,2165 1558.33,2108.33 C7_1.2@1470,2108.33 ; v1(2020,2165) 2085,2165 ; 2085,1813.54 2085,1702.99 ; 2085,1816.54 2085,2165 ; R3_2.2@2085,2293.46 2085,2165 ; v2(2090,1511) 2085,1516 2085,1702.99 ; R3_2.2 2091.54,2420 ; 2248,1186 v2@2248,1292 ; U5_2.16 2525.47,2400 C9_2.2@2530.47,2405 ; C10_2.2@2530.26,2457.5 2122.5,2457.5 2091.54,2426.54 2091.54,2420 ; C10_2.2 2531.46,2405.99 C9_2.2@2530.47,2405 ; 2773.97,2457 2710,2393.03 2710,2371.92 2683.08,2345 2554.14,2345 2530.47,2368.67 C9_2.2 C9_2.2@2530.47,2405 ; 2773.97,2458 C8_2.2@3119.46,2458 ; C8_2.2@3119.46,2457 C8_2.2 C7_2.2@3126.46,2395.99 ; U3_2.16 3518.54,2398.02 C6_2.2 3523.54,2515 3570,2515 ; C10_1.2@1519.04,1707.89 1519.74,1707.19 1575.89,1707.19 R2_1.2 1660,1703.07 1660.08,1702.99 2085,1702.99
  Top Layer w45: 3570,2515 3627,2515
  Top Layer w50: P3.1 3580,2657 3650,2587
  Top Layer w60: 1668,1186 2248,1186 2886,1186 3651,1951 3651,2244 ; 3650,2256 3650,2587
  Bottom Layer w20: 2090,1476 v2(2090,1511) ; 2152,1385 2154,1385 ; 2221.5,1317.5 v2(2247,1292) ; v2(3188,2277) 3328,2277 3361,2244 v2(3590,2244)
  Bottom Layer w35: v1(1860,2165) v1(2020,2165) ; 2090,1476 2090,1447 2152,1385 ; 2154,1385 2221.5,1317.5
ADC_OUTA1: P1.10 R1_1.1 U3_1.3 | length 1561.6
  Top Layer w20: U3_1.3 1658.08,2423.46 R1_1.1 R1_1.1@1667.5,2414.04
  Top Layer w25: v1(2220,2010) 2264,2010 2711,1563 P1.10
  Top Layer w35: R1_1.1@1667.5,2414.04 1667.5,2362.5 1775,2255 1860,2255 1940,2175 1940,2105 v1(2035,2010)
  Bottom Layer w15: v1(2035,2010) v1(2220,2010)
ADC_OUTA2: P1.12 R1_2.1 U3_2.3 | length 1053.7
  Top Layer w20: R1_2.1@3218.92,2181.54 R1_2.1 3218.92,2243.92 3265,2290 3267.43,2290 3273.97,2296.54 U3_2.3
  Top Layer w25: P1.12 3215,1856 3215,2177.62 R1_2.1@3218.92,2181.54
ADC_OUTB1: P1.7 R2_1.1 U4_1.3 | length 1201.3
  Top Layer w25: U4_1.3 1570,1770 R2_1.1 v2(2010,1770)
  Bottom Layer w20: v2(2010,1770) 2417,1770 2614,1573 P1.7@2622,1573
ADC_OUTB2: P1.11 R2_2.1 U4_2.3 | length 907.4
  Top Layer w25: R2_2.1@2705,2299.99 2760,2299.99 ; P1.11 2760,1625 2760,2299.99 ; U4_2.3 2760,2299.99
ADC_OUTC1: P1.9 R3_1.1 U5_1.3 | length 1261.9
  Top Layer w20: U5_1.3 R3_1.1 1625.49,1308.46 R3_1.1@1639.95,1294
  Top Layer w25: R3_1.1@1639.95,1294 2180,1294 2229,1343 2610,1343 2722,1455 P1.9
ADC_OUTC2: P1.8 R3_2.1 U5_2.3 | length 1390.5
  Top Layer w20: R3_2.1@2158.46,2279.51 R3_2.1 2163.46,2300 U5_2.3@2232.43,2300
  Top Layer w25: R3_2.1@2158.46,2279.51 2147,2268.05 2147,1556 2309,1394 2553,1394 P1.8
AGND: ?.1 C5_1.1 C5_2.1 C6_1.1 C6_2.1 C7_1.1 C7_2.1 C8_1.1 C8_2.1 C9_1.1 C9_2.1 C10_1.1 C10_2.1 P3.2 S1.S1 S2.S2 S3.S3 S4.S4 U3_1.6 U3_1.7 U3_1.8 U3_2.6 U3_2.7 U3_2.8 U4_1.6 U4_1.7 U4_1.8 U4_2.6 U4_2.7 U4_2.8 U5_1.6 U5_1.7 U5_1.8 U5_2.6 U5_2.7 U5_2.8 | length 1712.9
  Top Layer w10: v1(1450,1600) 1450,1597.91 1451.46,1596.46 C9_1.1@1451.46,1660 ; C10_1.1@1451.46,1710 C10_1.1@1455,1713.54
  Top Layer w15: v1(1411.46,2056.46) C7_1.1@1411.46,2100 ; v2(1860,1329) U5_1.8 ; U5_2.8 v1(2300,2050)
  Top Layer w20: C6_1.1 v1(1217,2437) ; C7_1.1@1411.46,2100 C7_1.1@1411.46,2110 ; v2(3312,2925) 3312,2884 ?.1
  Top Layer w29.53: C9_1.1 1460.96,1660.49 1460.96,1709.51 C10_1.1 ; v1(2588.54,2483.54) C10_2.1 2589.04,2444.51 2589.04,2395.49 C9_2.1 ; C8_2.1 3184.04,2449.51 3184.04,2395.49 C7_2.1 3184.53,2355.47 v1(3185,2355) ; v1(3410,2515) C6_2.1@3461.46,2515
  Top Layer w35: C6_1.1 1218.54,2378.54 C5_1.1@1285,2378.54 ; C7_1.1@1411.46,2110 C8_1.1 ; U3_1.6 1590,2575.46 1590,2673.46 v1(1590,2740) ; U4_1.6 U4_1.7 U4_1.8 v1(1917.72,1837.72) ; U5_1.6 U5_1.7 U5_1.8 v1(1927.72,1377.72) ; U5_2.8 U5_2.7 U5_2.6 ; v1(2849.72,2005.28) U4_2.8 U4_2.7 U4_2.6 ; v1(3305.46,2001.83) U3_2.8 U3_2.7 U3_2.6 U3_2.6@3305.46,2150 ; C5_2.1@3461.46,2465 C6_2.1@3461.46,2515
NetC3_1: 
NetD1_2: ?.2 R4.1 | length 44
  Top Layer w35: R4.1 ?.2@3315,2810.51
NetP1_1: 
NetP1_2: 
NetP1_3: 
NetP1_4: 
S0_1: "Mux Sel TP Connector.1" P4_1.3 U3_1.11 U3_2.11 U4_1.11 U4_2.11 U5_1.11 U5_2.11 | length 3799.8
  Top Layer w15: P4_1.3 v1(1895,2460) ; v1(2370,2150) U5_2.11 ; 2564.78,2150 2565,2150.22 ; v1(3000,2150) U4_2.11 ; v1(3460,2150) 3460,2148.08 v1@3461.54,2146.54
  Top Layer w20: U3_1.11 1458.46,2573.46 v1(1459.23,2574.23) ; 1580,2895 1630,2895 1720,2805 P4_1.3 ; v1(1720,1975) U4_1.11 v1(1720,2110) ; U5_1.11 1760,1655 v1(1765,1660) ; U5_2.11 2564.78,2150 v1(2665,2150) ; U4_2.11 v1(3150,2150) ; v1@3461.54,2146.54 U3_2.11
  Bottom Layer w15: v1(1459.23,2574.23) 1719.23,2574.23 1720,2575 ; v1(1720,1975) 1765,1930 v1(1765,1660) ; v1(1720,2110) 1720,2575 ; P4_1.3 1720,2575 ; v1(1895,2460) 1895,2395 2140,2150 v1(2370,2150)
  Bottom Layer w20: v1(2665,2150) v1(3000,2150) ; v1(3150,2150) v1(3460,2150)
S0_2: 
S1_1: "Mux Sel TP Connector.2" P4_1.2 U3_1.10 U3_2.10 U4_1.10 U4_2.10 U5_1.10 U5_2.10 | length 4294.3
  Top Layer w15: P4_1.2 1858,2617 1940,2535 v1(1940,2460) ; v1(2325,2180) 2325,2145 2370,2100 U5_2.10
  Top Layer w20: U3_1.10 v1(1458.46,2623.46) ; 1480,2895 1525,2940 1779.76,2940 1855,2864.76 1855,2638 P4_1.2 ; v1(1770,1970) U4_1.10 v1(1770,2110) ; U5_1.10 v1(1810,1655) ; U5_2.10@2447,2100 2447.5,2100.5 v1(2665,2100.5) ; v1(3000,2100) U4_2.10 v1(3150,2100) ; v1(3460,2095) 3461.54,2096.54 U3_2.10
  Bottom Layer w15: v1(1770,1970) 1810,1930 v1(1810,1655) ; v1(1770,2110) 1770,2455 1860,2545 P4_1.2@1860,2635 ; v1(1940,2460) 1940,2405 2165,2180 v1(2325,2180)
  Bottom Layer w20: v1(1458.46,2623.46) 1623.46,2623.46 1684.53,2684.53 1808.47,2684.53 P4_1.2 ; v1(2665,2100.5) 2999.5,2100.5 v1(3000,2100) ; v1(3150,2100) 3155,2095 v1(3460,2095)
S1_2: 
S2_1: "Mux Sel TP Connector.3" P4_1.1 U3_1.9 U3_2.9 U4_1.9 U4_2.9 U5_1.9 U5_2.9 | length 4620.5
  Top Layer w15: U3_1.9 1458.46,2673.46 v1(1460,2675) ; P4_1.1@1995,2635 P4_1.1 ; v1(2185,2225) 2185,2090 v1(2190,2090) ; v1(2395,2050) U5_2.9 ; v1@2660,2050 v1(2663,2050)
  Top Layer w20: v1(1820,1970) U4_1.9 v1(1820,2110) ; U5_1.9 v1(1860,1655) ; v1(1905,2810) 1945,2810 1995,2760 P4_1.1@1995,2635 ; P4_1.1 1996,2489 v1(2020,2465) ; U5_2.9 v1@2660,2050 ; v1(3000,2050) U4_2.9 v1(3150,2050) ; v1(3460,2050) 3516.57,2050 U3_2.9
  Bottom Layer w15: v1(1820,1970) 1820,1965 1860,1925 v1(1860,1655) ; v1(1820,2110) 1820,2433.77 1996,2609.77 P4_1.1 ; v1(2020,2465) 2020,2370 2165,2225 v1(2185,2225) ; v1(2190,2090) 2360,2090 2395,2055 v1(2395,2050)
  Bottom Layer w20: 1380,2895 1380,2855 1425,2810 v1(1905,2810) ; v1(1460,2675) 1615,2675 1660,2720 1911,2720 P4_1.1 ; v1(2663,2050) v1(3000,2050) ; v1(3150,2050) v1(3460,2050)
S2_2: 
TS_IN1_1: "Thermistor Connector.1"@1293,2131 U3_1.13 | length 600.6
  Top Layer w10: 1293,2131 v1(1331,2131) ; U3_1.13 1441.54,2473.46 1525,2390 1525,2274.64 1505.36,2255 v1(1470,2255)
  Bottom Layer w10: v1(1331,2131) 1359,2131 1465,2237 1465,2250 v1(1470,2255)
TS_IN1_2: "Thermistor Connector.1"@2966.54,2637.57 U3_2.13 | length 727.4
  Top Layer w10: 2966.54,2637.57 3132.79,2637.57 3455,2315.36 3455,2315 3465,2305 3465,2285 3503.46,2246.54 U3_2.13
TS_IN2_1: "Thermistor Connector.2"@1215,2131 U3_1.14 | length 634.8
  Top Layer w10: 1215,2131 1256,2090 v1(1295,2090) ; U3_1.14 1436.54,2423.46 1500,2360 v1(1500,2320)
  Bottom Layer w10: v1(1295,2090) 1346.28,2090 1500,2243.72 v1(1500,2320)
TS_IN2_2: "Thermistor Connector.2"@2966.54,2715.57 U3_2.14 | length 727.3
  Top Layer w10: 2966.54,2715.57 3083.07,2715.57 3475,2323.64 3475,2323.28 3501.74,2296.54 U3_2.14
TS_IN3_1: "Thermistor Connector.3"@1293,2052 U3_1.15 | length 416.4
  Top Layer w10: 1293,2052 1367.64,2126.64 v1(1367.64,2175) ; U3_1.15 1391.54,2373.46 1435,2330 v1(1435,2255)
  Bottom Layer w10: v1(1367.64,2175) 1435,2242.36 v1(1435,2255)
TS_IN3_2: "Thermistor Connector.3"@2887.54,2637.57 U3_2.15 | length 875.3
  Top Layer w10: 2887.54,2637.57 2925,2675.02 2925,2724.74 2950.26,2750 3079.64,2750 3483.1,2346.54 U3_2.15
TS_IN4_1: "Thermistor Connector.4"@1215,2052 U3_1.12 | length 638.4
  Top Layer w10: 1215,2052 1253,2052 v1(1255,2050) ; v1(1300,2525) 1371.89,2525 U3_1.12
  Bottom Layer w10: v1@1255,2045 v1(1255,2050) 1255,2145 1330,2220 1330,2465 1300,2495 v1(1300,2525)
TS_IN4_2: "Thermistor Connector.4"@2887.54,2715.57 U3_2.12 | length 1024.8
  Top Layer w10: 2887.54,2715.57 2887.54,2727.54 2930,2770 3095,2770 3400,2465 v1(3405,2465) ; v1(3430,2305) 3430,2230 3463.46,2196.54 U3_2.12 U3_2.12@3521.57,2195
  Bottom Layer w10: v1(3405,2465) 3405,2460 3430,2435 v1(3430,2305)
TS_IN5_1: "Thermistor Connector.5"@1293,1973 U3_1.1 | length 507.8
  Top Layer w10: 1293,1973 v1(1293,2003) ; v1(1535,2185) 1588,2238 U3_1.1
  Bottom Layer w10: v1(1293,2003) 1475,2185 v1(1535,2185)
TS_IN5_2: "Thermistor Connector.5"@2808.54,2637.57 U3_2.1 | length 621.2
  Top Layer w10: 2808.54,2637.57 2841.11,2605 3120,2605 3295,2430 3295,2396.54 U3_2.1 ; U3_2.1@3320,2400 U3_2.1@3323.46,2396.54
TS_IN6_1: "Thermistor Connector.6"@1215,1973 U3_1.5 | length 913.9
  Top Layer w10: v1(1200,2225) 1150,2175 1150,2020 1197,1973 1215,1973 ; v1@1305,2280 v1(1370,2280) ; v1(1480,2525) 1586.46,2525 U3_1.5
  Bottom Layer w10: v1(1200,2225) 1255,2280 v1(1300,2280) v1@1305,2280 ; v1(1370,2280) 1372.5,2282.5 1392.5,2282.5 1480,2370 v1(1480,2525)
TS_IN6_2: "Thermistor Connector.6"@2808.54,2715.57 U3_2.5 | length 1028
  Top Layer w10: 2808.54,2715.57 2882.98,2790 2880,2792.98 v1(2880,2795)
  Top Layer w18: U3_2.5 3361.54,2196.54 3397,2232 3397,2296 v1(3394,2299)
  Bottom Layer w10: v1(2880,2795) 2932.36,2795 3397,2330.36 3397,2303 3394,2300 v1(3394,2299)
TS_IN7_1: "Thermistor Connector.7"@1293,1894 U3_1.2 | length 678
  Top Layer w10: 1293,1894 1293,1918 1385,2010 v1(1430,2010) ; v1(1535,2150) 1545,2160 1545.36,2160 1560,2174.64 1560,2175 1635,2250 1635,2345 1606.54,2373.46 U3_1.2
  Bottom Layer w10: v1(1430,2010) 1535,2115 v1(1535,2150)
TS_IN7_2: "Thermistor Connector.7"@2729.54,2637.57 U3_2.2 | length 731.4
  Top Layer w10: 2729.54,2637.57 2792.11,2575 3121.72,2575 3261.91,2434.8 3261.91,2375.09 3290.46,2346.54 U3_2.2
TS_IN8_1: "Thermistor Connector.8"@1215,1894 U3_1.4 | length 933
  Top Layer w10: 1215,1894 1255,1934 1255,1995 1240.74,2009.26 1195.74,2009.26 1170,2035 1170,2135 v1(1215,2180) ; v1(1300,2250) v1(1365.16,2250) ; v1(1510,2465) 1518.46,2473.46 U3_1.4
  Bottom Layer w10: v1(1215,2180) 1285,2250 v1(1300,2250) ; v1(1365.16,2250) 1390,2250 1510,2370 v1(1510,2465)
TS_IN8_2: "Thermistor Connector.8"@2729.54,2715.57 U3_2.4 | length 980
  Top Layer w10: 2729.54,2715.57 2778.98,2765 v1(2800,2765)
  Top Layer w18: 3356.54,2246.54 3365,2255 3359,2261 v1(3359,2323)
  Top Layer w20: U3_2.4 3356.54,2246.54
  Bottom Layer w10: 2810,2765 2895,2765 2925,2735 2925,2695 2943.12,2676.88 3005.12,2676.88 v1(3359,2323)
TS_IN9_1: "Thermistor Connector.9"@1293,1815 U4_1.13 | length 463.6
  Top Layer w10: 1298,1815 1329.15,1815 1469.15,1955 1596.72,1955 1620,1978.28 U4_1.13
TS_IN9_2: "Thermistor Connector.9"@2650.54,2637.57 U4_2.13 | length 637.6
  Top Layer w10: 2650.54,2637.57 2650.54,2624.46 2750,2525 v1(2760,2525) ; v1(2935,2255) 3059.28,2255 U4_2.13
  Bottom Layer w10: v1(2760,2525) 2935,2350 v1(2935,2255)
TS_IN10_1: "Thermistor Connector.10"@1215,1815 U4_1.14 | length 492.7
  Top Layer w10: 1215,1815 1258,1858 1343.86,1858 1460.86,1975 1560,1975 1570,1985 U4_1.14
TS_IN10_2: "Thermistor Connector.10"@2650.54,2715.57 U4_2.14 | length 703.7
  Top Layer w10: 2650.54,2715.57 2690,2676.11 2690,2620 2760,2550 2885,2550 v1(2930,2505) ; v1(2985,2305) 3059.28,2305 U4_2.14
  Bottom Layer w10: v1(2930,2505) 2985,2450 v1(2985,2305)
TS_IN11_1: "Thermistor Connector.11"@1293,1736 U4_1.15 | length 458.4
  Top Layer w10: 1293,1736 1316,1736 1330,1750 v1(1330,1758) ; v1(1330,1900) 1357.58,1900 1452.58,1995 1505,1995 1520,2010 U4_1.15@1520,2040
  Bottom Layer w10: v1(1330,1758) v1(1330,1900)
TS_IN11_2: "Thermistor Connector.11"@2571.54,2637.57 U4_2.15 | length 690.4
  Top Layer w10: 2571.54,2637.57 2571.54,2623.46 v1(2630,2565) ; v1(3010,2400) 3010,2365 3025,2350 U4_2.15
  Bottom Layer w10: v1(2630,2565) 2930,2565 3010,2485 v1(3010,2400)
TS_IN12_1: "Thermistor Connector.12"@1215,1736 U4_1.12 | length 623.4
  Top Layer w10: 1215,1736 1262,1783 1315,1783 ; 1320,1783 1325.43,1783 1477.43,1935 1625,1935 1670,1980 U4_1.12
TS_IN12_2: "Thermistor Connector.12"@2571.54,2715.57 U4_2.12 | length 837.3
  Top Layer w10: 2571.54,2715.57 2610,2677.11 2610,2630 2740,2500 v1(2885,2500) ; v1@3005,2200 U4_2.12
  Bottom Layer w10: v1(2885,2500) 2955,2430 2955,2275 3000,2230 v1(3000,2200)
TS_IN13_1: "Thermistor Connector.13"@1292,1657 U4_1.1 | length 311.7
  Top Layer w10: 1297,1657 1370.72,1657 1376.77,1663.06 1376.77,1772.13 1442.36,1837.72 U4_1.1
TS_IN13_2: "Thermistor Connector.13"@2492.54,2638.57 U4_2.1 | length 456
  Top Layer w10: 2492.54,2638.57 2591.11,2540 2670,2540 v1(2735,2475) ; v1(2800,2420) 2820,2400 U4_2.1
  Bottom Layer w10: v1(2735,2475) 2745,2475 v1(2800,2420)
TS_IN14_1: "Thermistor Connector.14"@1214,1657 U4_1.5 | length 658.5
  Top Layer w10: 1214,1657 1260,1703 1330,1703 1356.77,1729.77 1356.77,1786.06 1485.72,1915 1645,1915 1670,1890 U4_1.5
TS_IN14_2: "Thermistor Connector.14"@2492.54,2716.57 U4_2.5 | length 796.2
  Top Layer w10: v1@2800,2199 2840.72,2199 2844.72,2195 U4_2.5
  Top Layer w15: 2492.54,2716.57 2518.43,2716.57 2535,2700 v1(2535,2674.11) ; v1(2645,2275) 2645,2215 2660,2200 v1(2665,2200)
  Bottom Layer w10: v1(2535,2674.11) 2535,2620 2645,2510 v1(2645,2275) ; v1@2665,2195 2669,2199 v1(2797,2199) v1@2800,2199
TS_IN15_1: "Thermistor Connector.15"@1292,1578 U4_1.2 | length 399.4
  Top Layer w10: 1297,1578 1358.7,1578 1417.76,1637.05 1417.76,1736.88 1426.54,1745.67 1445.67,1745.67 1520,1820 U4_1.2
TS_IN15_2: "Thermistor Connector.15"@2413.54,2638.57 U4_2.2 | length 571.6
  Top Layer w10: 2413.54,2638.57 2413.54,2611.46 2505,2520 2640,2520 v1(2685,2475) ; v1(2785,2375) 2810,2350 U4_2.2
  Bottom Layer w10: v1(2685,2475) v1(2785,2375)
TS_IN16_1: "Thermistor Connector.16"@1214,1578 U4_1.4 | length 642.6
  Top Layer w10: 1214,1578 1220,1578 1265,1623 1365,1623 1396.77,1654.77 1396.77,1744.18 v1(1431.29,1778.71) ; v1(1535,1890) 1540,1895 1605,1895 1620,1880 U4_1.4
  Bottom Layer w10: v1(1431.29,1778.71) 1431.29,1783.71 1535,1887.41 v1(1535,1890)
TS_IN16_2: "Thermistor Connector.16"@2413.54,2716.57 U4_2.4 | length 775
  Top Layer w10: 2413.54,2716.57 2455,2675.11 2455,2620 v1(2510,2565) ; v1(2800,2250) U4_2.4
  Bottom Layer w10: v1(2510,2565) 2554,2521 2554,2327.63 2631.63,2250 v1(2800,2250)
TS_IN17_1: "Thermistor Connector.17"@1293,1499 U5_1.13 | length 472.9
  Top Layer w10: 1298,1499 1424,1499 1429,1494 1433,1498 v1(1435,1498)
  Top Layer w20: v1(1660,1495) 1660,1590.28 1661,1591.28 U5_1.13
  Bottom Layer w10: v1(1435,1498) v1(1660,1495) v1@1660,1504
TS_IN17_2: "Thermistor Connector.17"@2334.54,2637.57 U5_2.13 | length 560.3
  Top Layer w10: 2334.54,2637.57 2337.43,2637.57 v1(2480,2495) ; U5_2.13@2447,2250 2525,2250 v1@2530,2245
  Bottom Layer w10: v1(2480,2495) 2530,2445 v1(2530,2250) v1@2530,2245
TS_IN18_1: "Thermistor Connector.18"@1215,1499 U5_1.14 | length 465
  Top Layer w10: 1215,1499 1225,1499 1266,1540 1425.5,1540 v1(1429.12,1543.63) ; v2@1610,1543 v2(1612,1541)
  Top Layer w15: v2@1610,1543 U5_1.14
  Bottom Layer w15: v1@1431.75,1541 v2(1612,1541)
TS_IN18_2: "Thermistor Connector.18"@2334.54,2715.57 U5_2.14 | length 539.6
  Top Layer w10: 2334.54,2715.57 2349.43,2715.57 2375,2690 v1(2375,2665) ; v1(2370,2300) U5_2.14@2447,2300
  Bottom Layer w10: v1(2370,2300) 2346.45,2323.55 2346.45,2538.7 2375,2567.25 v1(2375,2665)
TS_IN19_1: "Thermistor Connector.19"@1293,1420 U5_1.15 | length 367.5
  Top Layer w10: 1298,1420 1446,1420 1560,1534 U5_1.15
TS_IN19_2: "Thermistor Connector.19"@2255.54,2637.57 U5_2.15 | length 400.3
  Top Layer w10: 2255.54,2637.57 v1(2373.11,2520) ; v1(2390,2350) U5_2.15@2447,2350
  Bottom Layer w10: v1(2373.11,2520) 2390,2503.11 v1(2390,2350)
TS_IN20_1: "Thermistor Connector.20"@1215,1420 U5_1.12 | length 640.9
  Top Layer w10: 1215,1420 1217,1420 1260,1463 v1(1433,1463)
  Top Layer w20: v1(1710,1465) U5_1.12
  Bottom Layer w10: v1(1433,1463) 1435,1465 v1(1710,1465)
TS_IN20_2: "Thermistor Connector.20"@2255.54,2715.57 U5_2.12 | length 624.6
  Top Layer w10: 2255.54,2715.57 2290,2681.11 v1(2290,2665) ; v1(2395,2200) U5_2.12@2447,2200
  Bottom Layer w10: v1(2290,2665) 2290,2636.85 2324.53,2602.32 2326.42,2268.58 v1(2395,2200)
TS_IN21_1: "Thermistor Connector.51"@1293,1343 U5_1.1 | length 234.9
  Top Layer w10: 1298,1343 1343,1388 1499.72,1388 U5_1.1
TS_IN21_2: "Thermistor Connector.51"@2178.54,2637.57 U5_2.1 | length 348.4
  Top Layer w10: 2178.54,2637.57 2290,2526.11 v1(2290,2515) ; U5_2.1@2232.43,2400 U5_2.1 v1(2295,2400)
  Bottom Layer w10: v1(2290,2515) 2295,2510 v1(2295,2400)
TS_IN22_1: "Thermistor Connector.22"@1215,1343 U5_1.5 | length 583
  Top Layer w10: 1215,1343 1263,1295 v1(1535,1295)
  Top Layer w15: v1(1709,1327) 1709,1376.72 U5_1.5
  Bottom Layer w10: v1(1535,1295) 1685,1295 1709,1319 v1(1709,1327)
TS_IN22_2: "Thermistor Connector.22"@2178.54,2715.57 U5_2.5 | length 650.4
  Top Layer w10: v1(2178.54,2521.46) 2178.54,2576.46 2140,2615 2140,2677.02 2178.54,2715.57
  Top Layer w15: U5_2.5 2265.1,2200 2296.04,2230.94 2296.04,2273.96 v1(2295,2275)
  Bottom Layer w10: v1(2178.54,2521.46) 2178.54,2346.46 2250,2275 v1(2295,2275)
Vref: 
pads on no net: P1.1 P1.2 P1.3 P1.4 P1.5 P1.6 U5_1.2 U5_1.4 U5_2.2 U5_2.4
copper on no net: | length 15
  Top Layer w25: 2414,1467 2429,1467

## Polygon pours and split planes (outlines as drawn)
AGND on Bottom Layer "AGND" (solid, remove dead copper, pour order 0): 3695,2975 1000,2975 1000,1000 3695,1000 3695,1035

## Silkscreen, mask and mechanical layers (free items; w line width, h text height)
Top Overlay:
  text "Sel C" at 1355,2815 h30
  text "Sel B" at 1460,2815 h30
  text "Sel A" at 1560,2815 h30
  text "PWR LED" at 3290,2787 h30 r90
  text "3.3V IN" at 3593,2654 h30
  text "GND" at 3346,2650 h30
  text "Will McKnight" at 1875,1060 h39.37
  text "z" at 2117,1052 h78.74
  text "REV 0.3" at 1880,1025 h39.37
  text "Thermistor Expansion Top Board" at 2117,1017 h39.37
  text "3" at 1305,1015 h150
Board Outline:
  lines w4.92: 1000.01,1000.01 3695,1000.01 3695,2975 1000,2975 1000,1000.02 ; 1000,1000.02 1000.01,1000.01